# Altium PCB NeptuneSense_base_station.PcbDoc
Units mil, origin at the board's own origin, x right, y up, seen from the top; angles counter-clockwise.
Board outline 2980 x 3565 mil, 2 copper layers (Top Layer, Bottom Layer); 37 components, 30 nets, 216 pads, 27 vias.
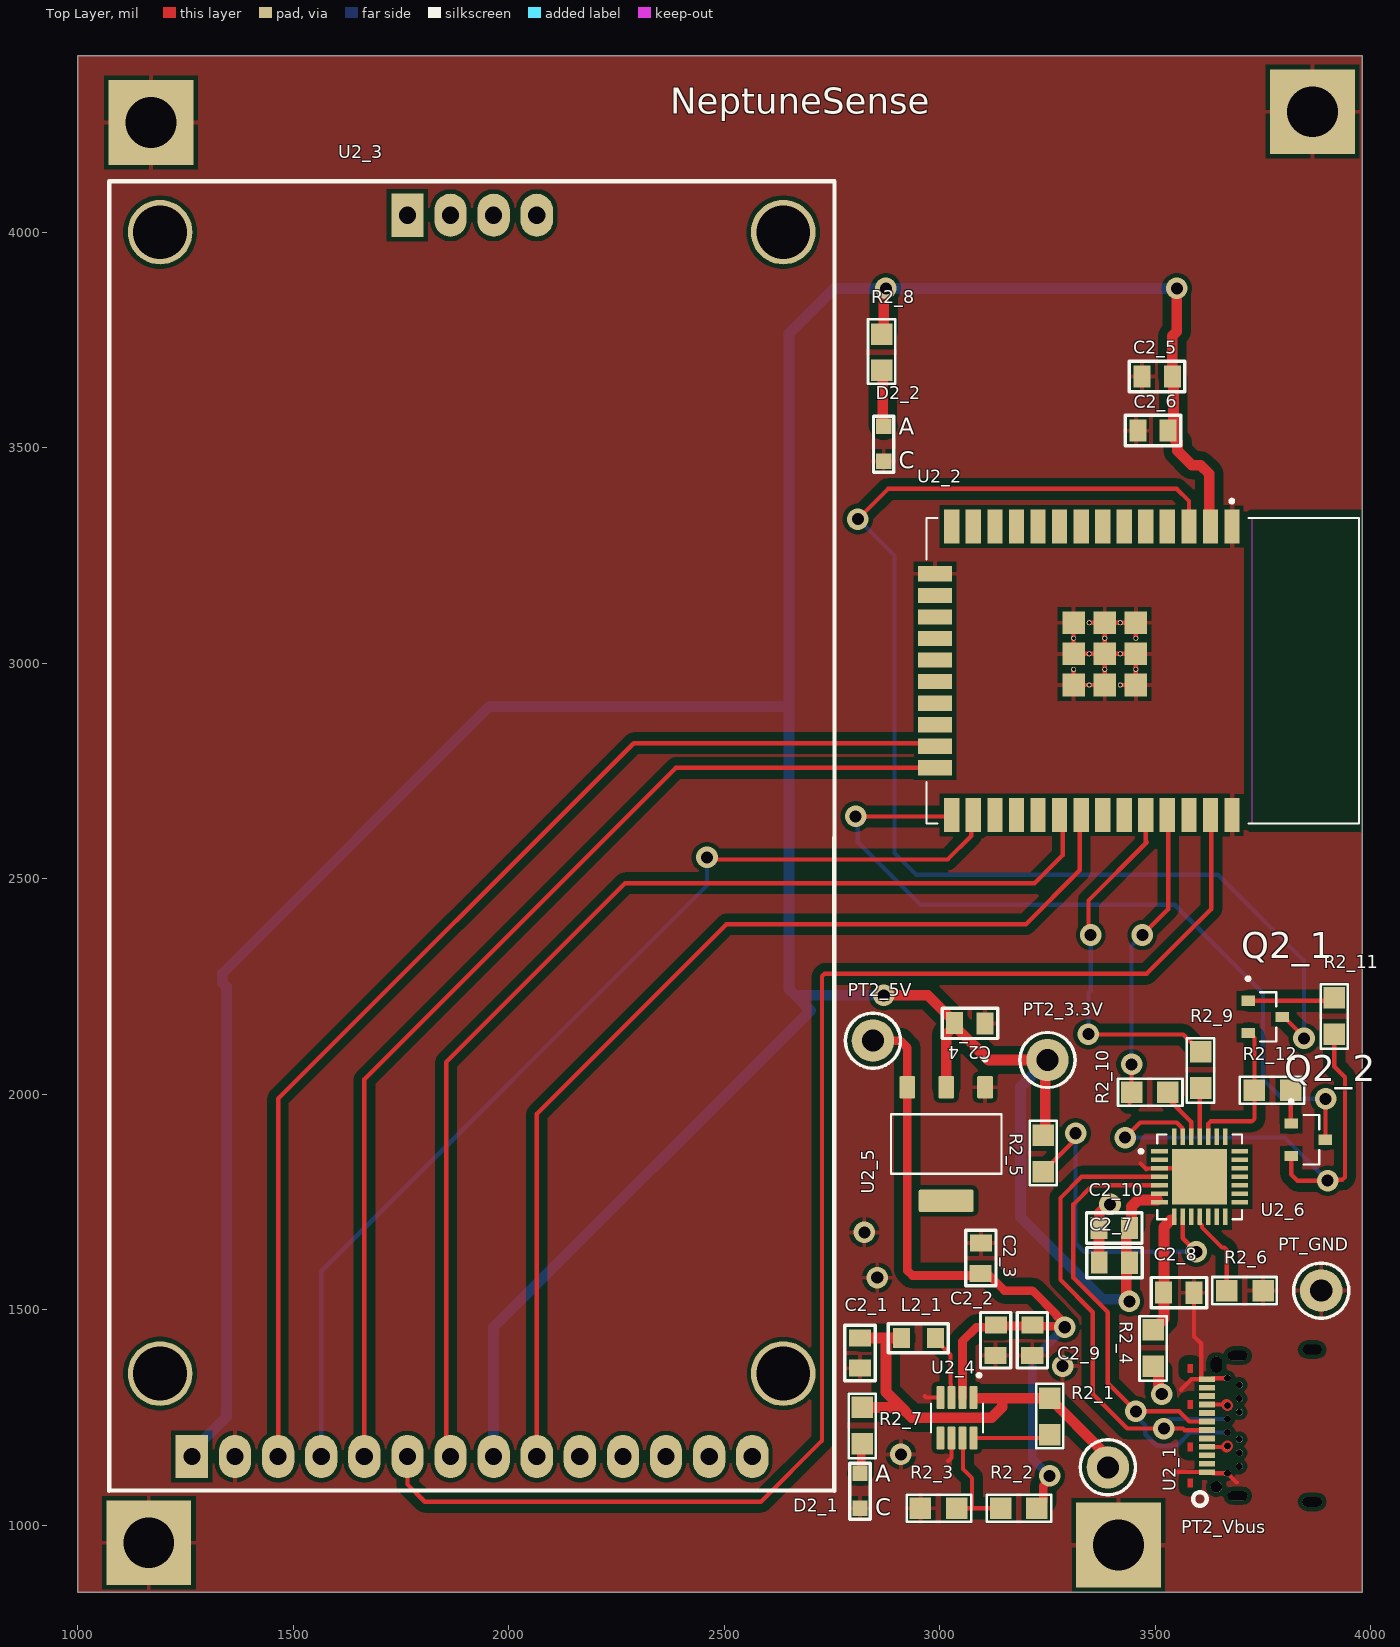
[diagram p0: Top Layer view]
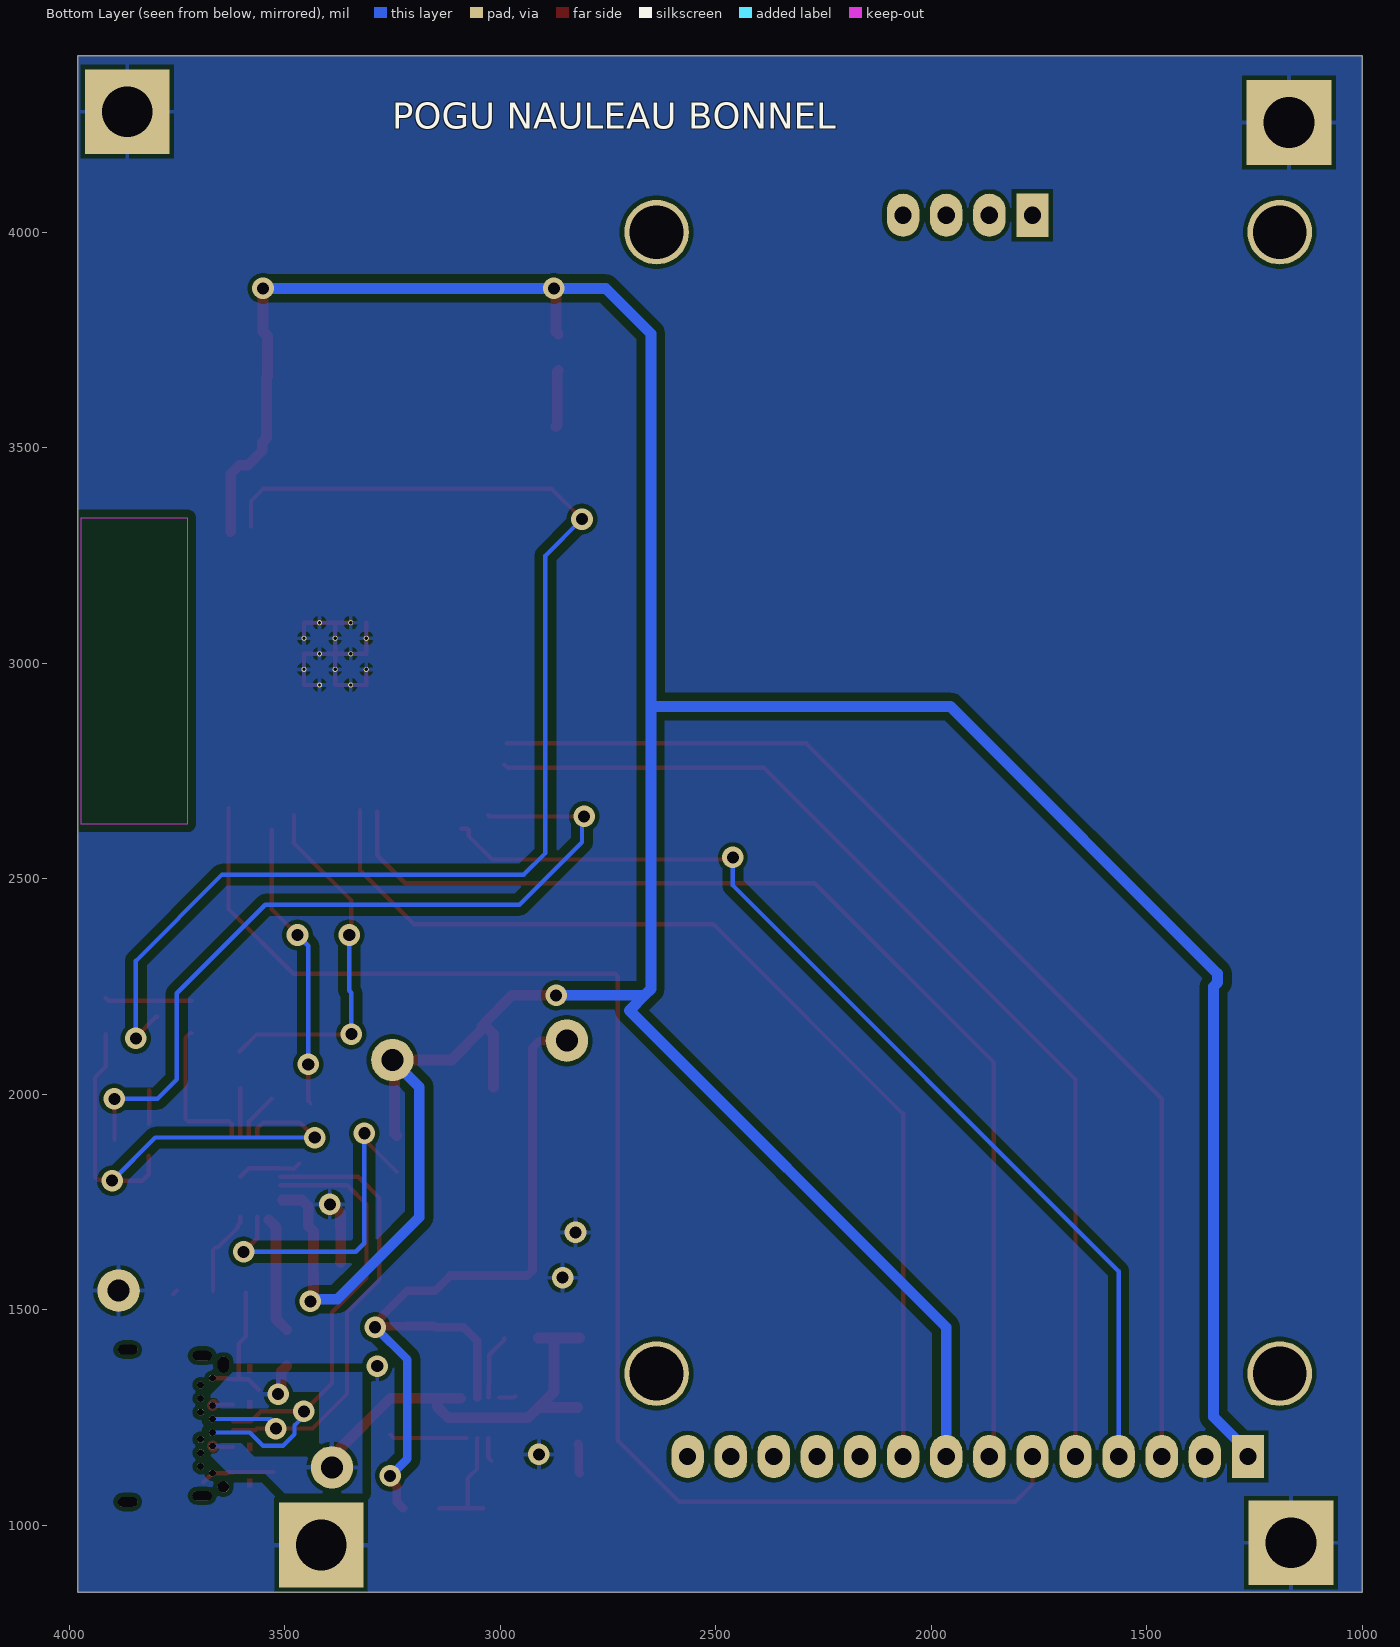
[diagram p1: Bottom Layer view, seen from below]
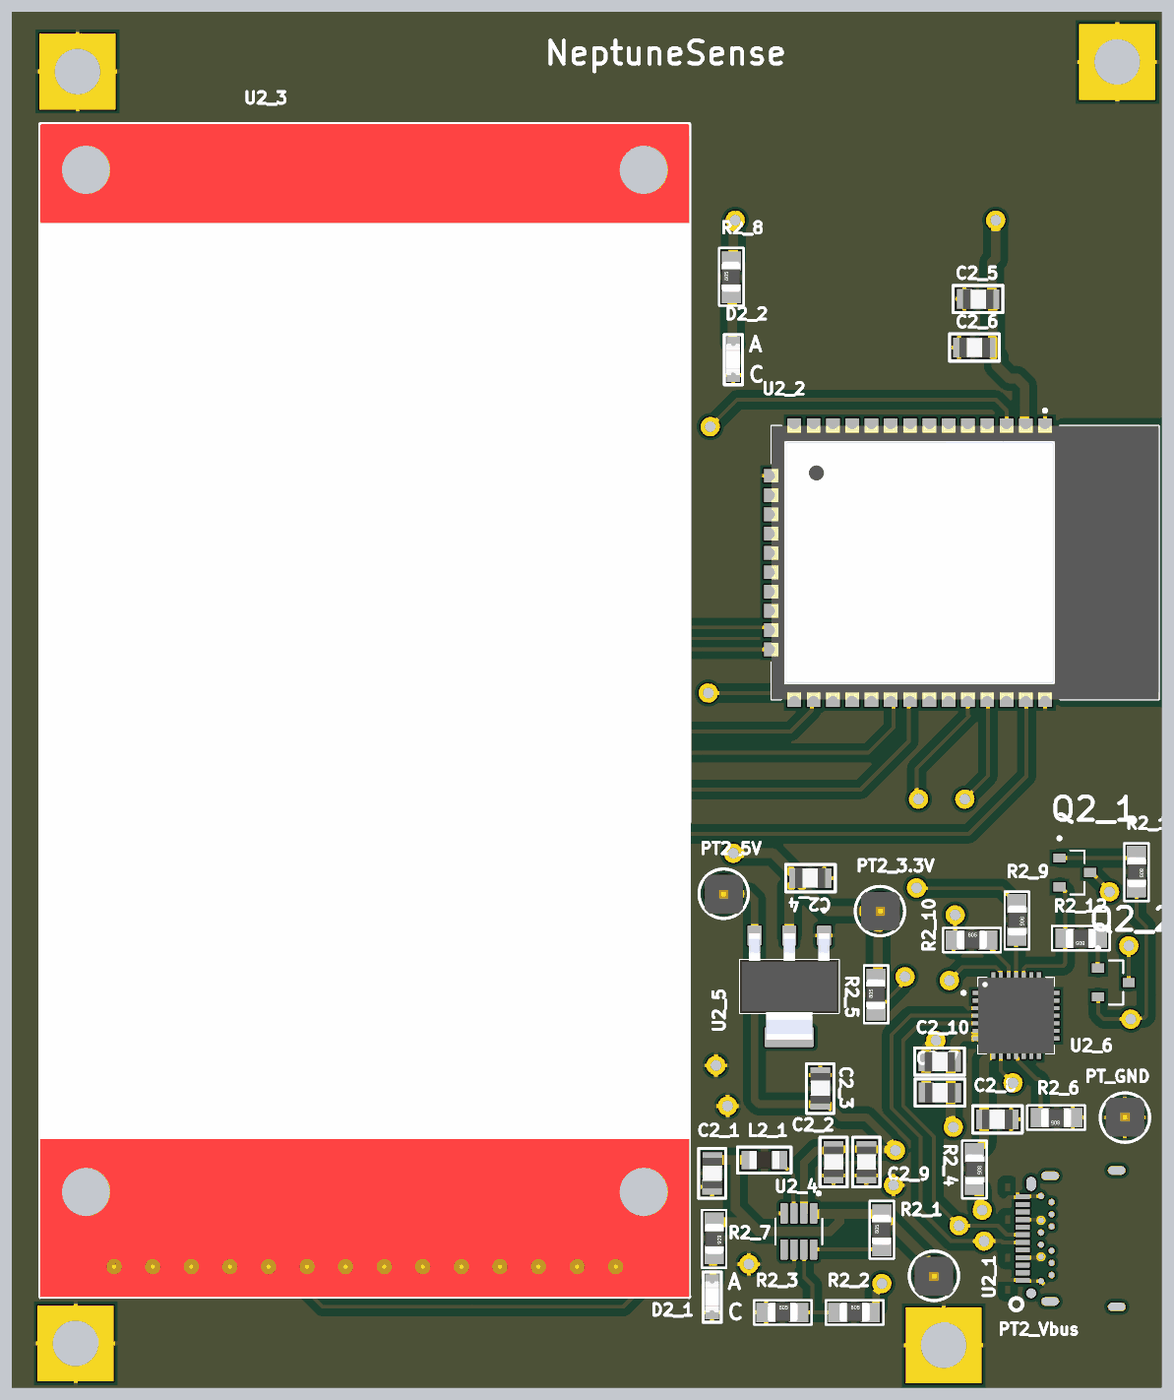
[diagram p2: 3D render of the assembled board from above, using the file's embedded part models]

## Layer stack, top to bottom
Top Solder: solder mask 0.4, Solder Resist, Dk 3.5
Top Layer: signal copper 1.4
Dielectric 1: dielectric 12.6, FR-4, Dk 4.8
Bottom Layer: signal copper 1.4
Bottom Solder: solder mask 0.4, Solder Resist, Dk 3.5

## Board outline
1000,845 1000,4410 3980,4410 3980,845

## Design rules (kind name [scope] priority, off if disabled: settings)
Clearance [All] p1: gap=10 ignorepadtopadclearanceinfootprint=FALSE except(0: Arc-Text Arc-Hole Track-Text Track-Hole SMDPad-Text SMDPad-Hole THPad-Text THPad-Hole Via-Text Via-Hole Fill-Text Fill-Hole Poly-Text Poly-Hole Region-Text Region-Hole Text-Text Text-Hole; 4: Arc-Arc Arc-Track Arc-SMDPad Arc-THPad Track-Track Track-SMDPad Track-THPad SMDPad-SMDPad SMDPad-THPad THPad-THPad; 19.68: Arc-Fill Arc-Poly Arc-Region Track-Fill Track-Poly Track-Region Fill-Fill Fill-Poly Fill-Region Poly-Poly Poly-Region Region-Region)
PolygonConnect [All] p1: connectstyle=Relief reliefconductorwidth=10 reliefentries=4 polygonreliefangle="90 Angle" airgapwidth=10
RoutingVias [All] p1: holewidth=28 width=50 viastyle="Through Hole" minholewidth=28 minwidth=50 maxholewidth=28 maxwidth=50
SolderMaskExpansion [All] p1: expansion=4 istentingtop=FALSE
Width [All] p1: maxlimit=200 minlimit=10 preferedwidth=25
30 further rules are at their usual default settings.

## Components (designator, comment, footprint, x,y, rotation, side; value= is the part's Value field where it differs from the comment)
C2_1 "CMS_0805" CONDENSATEUR_CMS_0805 2815,1365 r90 top value=10µF
C2_2 "CMS_0805" CONDENSATEUR_CMS_0805 3129.61,1394.53 r90 top value=22µF
C2_3 "CMS_0805" CONDENSATEUR_CMS_0805 3095,1585 r90 top value=10µF
C2_4 "CMS_0805" CONDENSATEUR_CMS_0805 3105,2165 r180 top value=22µF
C2_5 "CMS_0805" CONDENSATEUR_CMS_0805 3469.06,3665.79 r0 top value=10µF
C2_6 "CMS_0805" CONDENSATEUR_CMS_0805 3459.53,3540.39 r0 top value=100nF
C2_7 "CMS_0805" CONDENSATEUR_CMS_0805 3370,1610 r0 top value=100nF
C2_8 "CMS_0805" CONDENSATEUR_CMS_0805 3590,1540 r180 top value=10uF
C2_9 "CMS_0805" CONDENSATEUR_CMS_0805 3214.61,1394.53 r90 top value=1µF
C2_10 "CMS_0805" CONDENSATEUR_CMS_0805 3369.53,1690.39 r0 top value=10uF
D2_1 "LED_CMS_0805" LED_CMS_0805 2815,1121.2 r0 top
D2_2 "LED_CMS_0805" LED_CMS_0805 2870,3550 r0 top
L2_1 "INDUCTANCE_CMS_0805" INDUCTANCE_CMS_0805 2990,1435 r180 top value=1µH
PT2_3.3V "POINT_TEST" POINT_TEST 3250,2080 r0 top
PT2_5V "POINT_TEST" POINT_TEST 2845,2125 r270 top
PT2_Vbus "POINT_TEST" POINT_TEST 3390,1135 r270 top
PT_GND "POINT_TEST" POINT_TEST 3885,1545 r90 top
Q2_1 "SS8050-G" TRANS_SS8050-G 3755,2180 r0 top
Q2_2 "SS8050-G" TRANS_SS8050-G 3855,1895 r0 top
R2_1 "RESISTANCE_CMS_0805" RESISTANCE_CMS_0805 3255,1211 r90 top value=100k
R2_2 "RESISTANCE_CMS_0805" RESISTANCE_CMS_0805 3141,1040 r0 top value=1M
R2_3 "RESISTANCE_CMS_0805" RESISTANCE_CMS_0805 2955,1040 r0 top value=137k
R2_4 "RESISTANCE_CMS_0805" RESISTANCE_CMS_0805 3495,1454 r270 top value=0
R2_5 "RESISTANCE_CMS_0805" RESISTANCE_CMS_0805 3240,1821 r90 top value=2k
R2_6 "RESISTANCE_CMS_0805" RESISTANCE_CMS_0805 3750,1545 r180 top value=10k
R2_7 "RESISTANCE_CMS_0805" RESISTANCE_CMS_0805 2820,1274 r270 top value=3,3k
R2_8 "RESISTANCE_CMS_0805" RESISTANCE_CMS_0805 2865,3680 r90 top value=3,3k
R2_9 "RESISTANCE_CMS_0805" RESISTANCE_CMS_0805 3605,2099 r270 top value=0
R2_10 "RESISTANCE_CMS_0805" RESISTANCE_CMS_0805 3445,2005 r0 top value=0
R2_11 "RESISTANCE_CMS_0805" RESISTANCE_CMS_0805 3915,2224 r270 top value=10k
R2_12 "RESISTANCE_CMS_0805" RESISTANCE_CMS_0805 3814,2010 r180 top value=10k
U2_1 "*" USB 3963.5,1231.5 r90 top
U2_2 "ESP32-WROOM-32" MODULE_ESP32-WROOM-32 3470.94,2982.87 r270 top
U2_3 "ECRAN_TFT_2.4_TACTILE" ECRAN_TFT_2.4_TACTILE 2755,1080 r90 top
U2_4 "MP3414AGJ-Z" SOT65P280X100-8N 3040,1250 r270 top
U2_5 "AMS1117-3.3" SOT229P700X180-4N 3015,1885 r270 top
U2_6 "CP2102N-A02-GQFN28" QFN50P500X500X80-29N 3602.91,1809.06 r0 top

## Footprints (in the part's own frame and the unit in brackets; to place one, negate y for a bottom-side part, rotate by r counter-clockwise, add the part's x,y. Pads: shape width x height; smd on the part's side, far side on the other; paste and mask are expansions set on the pad)
CONDENSATEUR_CMS_0805 [mm] "CONDENSATEUR CMS 0805 ; DIMENSIONS : 2mm x 1.25mm"
  rect 1x1.3 smd: 1(0,0) 2(1.79,-0.01)
  silkscreen extent -0.74,-0.9 2.53,0.89, body extent -0.09,-0.67 1.91,0.64, height 0.73
ECRAN_TFT_2.4_TACTILE [mil]
  round 150 hole 125: 0(272.44,1563.78) 0(272.44,118.11) 0(2920.47,118.11) 0(2920.47,1563.78)
  rect 100x75 hole 40: 1(80,1490) 18(2959.84,990)
  oval 100x75 hole 40: 2(80,1390) 3(80,1290) 4(80,1190) 5(80,1090) 6(80,990) 7(80,890) 8(80,790) 9(80,690) 10(80,590) 11(80,490) 12(80,390) 13(80,290) 14(80,190) 15(2959.84,690) 16(2959.84,790) 17(2959.84,890)
  silkscreen extent 0,-1 3039,1682, body extent 0,-1 3039,1681, height 337
INDUCTANCE_CMS_0805 [mm] "INDUCTANCE CMS 0805 ; DIMENSIONS : 2mm x 1.25mm"
  rect 1x1.2 smd: 1(0,0) 2(2,0)
  silkscreen extent -0.75,-0.85 2.78,0.86, body extent 0,-0.6 2,0.6, height 0.95
LED_CMS_0805 [mm] "LED CMS 0805 ; DIMENSIONS : 2.0mm x 0.9mm"
  rect 0.9x0.9 smd: 1(0,0) 2(0,-2.063)
  silkscreen extent -0.6,-2.7 0.6,0.6, body extent -0.45,-2.06 0.45,0, height 0.85
MODULE_ESP32-WROOM-32 [mm]
  rect 2x0.9 smd: 1(-8.5,5.26) 2(-8.5,3.99) 3(-8.5,2.72) 4(-8.5,1.45) 5(-8.5,0.18) 6(-8.5,-1.09) 7(-8.5,-2.36) 8(-8.5,-3.63) 9(-8.5,-4.9) 10(-8.5,-6.17) 11(-8.5,-7.44) 12(-8.5,-8.71) 13(-8.5,-9.98) 14(-8.5,-11.25) 25(8.5,-11.25) 26(8.5,-9.98) 27(8.5,-8.71) 28(8.5,-7.44) 29(8.5,-6.17) 30(8.5,-4.9) 31(8.5,-3.63) 32(8.5,-2.36) 33(8.5,-1.09) 34(8.5,0.18) 35(8.5,1.45) 36(8.5,2.72) 37(8.5,3.99) 38(8.5,5.26)
  rect 0.9x2 smd: 15(-5.715,-12.25) 16(-4.445,-12.25) 17(-3.175,-12.25) 18(-1.905,-12.25) 19(-0.635,-12.25) 20(0.635,-12.25) 21(1.905,-12.25) 22(3.175,-12.25) 23(4.445,-12.25) 24(5.715,-12.25)
  rect 1.33x1.33 smd: 39_1(-2.835,-0.405) 39_2(-1,-0.405) 39_3(0.835,-0.405) 39_4(-2.835,-2.24) 39_5(-1,-2.24) 39_6(0.835,-2.24) 39_7(-2.835,-4.075) 39_8(-1,-4.075) 39_9(0.835,-4.075)
  round 0.3 hole 0.2: 39_10(-1.917,-0.405) 39_11(-0.082,-0.405) 39_12(-2.835,-1.322) 39_13(-1,-1.322) 39_14(0.835,-1.322) 39_15(-1.917,-2.24) 39_16(-0.082,-2.24) 39_17(-2.835,-3.157) 39_18(-1,-3.157) 39_19(0.835,-3.157) 39_20(-1.917,-4.075) 39_21(-0.082,-4.075)
  Keep-Out Layer region: 9,6.45 -9,6.45 -9,12.75 9,12.75
  Keep-Out Layer region: 9,6.45 -9,6.45 -9,12.75 9,12.75
  silkscreen extent -10.1,-12.75 9,12.75, body extent -9,-12.75 9,12.75, height 3.2
POINT_TEST [mm] "PASTILLE TRAVERSANTE ; DIAMETRE = 2.5 mm ; DIAMETRE PERCAGE = 1.3 mm"
  round 2.5 hole 1.3: 1(0,0)
  silkscreen extent -1.63,-1.62 1.63,1.62, body extent -1.24,-1.27 1.3,1.27, height 5.94
QFN50P500X500X80-29N [mm]
  rect 0.99x0.27 smd: 1(-2.36,1.5) 2(-2.36,1) 3(-2.36,0.5) 4(-2.36,0) 5(-2.36,-0.5) 6(-2.36,-1) 7(-2.36,-1.5) 15(2.36,-1.5) 16(2.36,-1) 17(2.36,-0.5) 18(2.36,0) 19(2.36,0.5) 20(2.36,1) 21(2.36,1.5)
  rect 0.27x0.99 smd: 8(-1.5,-2.36) 9(-1,-2.36) 10(-0.5,-2.36) 11(0,-2.36) 12(0.5,-2.36) 13(1,-2.36) 14(1.5,-2.36) 22(1.5,2.36) 23(1,2.36) 24(0.5,2.36) 25(0,2.36) 26(-0.5,2.36) 27(-1,2.36) 28(-1.5,2.36)
  rect 3.25x3.25 smd paste-0.597: 29(0,0)
  silkscreen extent -3.55,-2.5 2.5,2.5, body extent -2.5,-2.5 2.5,2.5, height 0.38
RESISTANCE_CMS_0805 [mil] "RESISTANCE CMS 0805 ; DIMENSIONS : 2mm x 1.25mm"
  rect 50x50 smd: 1(0,0) 2(84,0)
  silkscreen extent -31,-31 118,31, body extent 4,-24 83,26, height 31
SOT65P280X100-8N [mm]
  rrect25% 1.34x0.49 smd: 1(-1.19,0.975) 2(-1.19,0.325) 3(-1.19,-0.325) 4(-1.19,-0.975) 5(1.19,-0.975) 6(1.19,-0.325) 7(1.19,0.325) 8(1.19,0.975)
  silkscreen extent -2.6,-1.54 0.85,1.54
SOT229P700X180-4N [mm]
  rrect15% 1.31x0.93 smd: 1(-3.345,2.29) 2(-3.345,0) 3(-3.345,-2.29)
  rrect15% 1.31x3.24 smd: 4(3.345,0)
  silkscreen extent -5.1,-3.25 1.75,3.25, body extent -3.5,-3.25 3.5,3.25, height 1.8
TRANS_SS8050-G [mm]
  rect 0.8x0.6 smd: 1(-1.01,0.95) 2(-1.01,-0.95) 3(1.01,0)
  silkscreen extent -1.11,-1.45 0.65,2.35
USB [mm]
  oval 0.55x1.15 hole 0.55 slot 1.15 at 90 deg: "\""(4.49,2.53) S1(-4.13,6.92) S2(4.13,6.92) S4(-4.49,2.53)
  rect 0.33x0.93 smd: A1(-2.75,8.73) A2(-2.25,8.73) A3(-1.75,8.73) A4(-1.25,8.73) A5(-0.75,8.73) A6(-0.25,8.73) A7(0.25,8.73) A8(0.75,8.73) A9(1.25,8.73) A10(1.75,8.73) A11(2.25,8.73) A12(2.75,8.73)
  round 0.4 hole 0.4: B1(2.8,7.52) B2(2.4,6.82) B3(1.6,6.82) B4(1.2,7.52) B5(0.8,6.82) B6(0.4,7.52) B7(-0.4,7.52) B8(-0.8,6.82) B9(-1.2,7.52) B10(-1.6,6.82) B11(-2.4,6.82) B12(-2.8,7.52)
  round 0.675 hole 0.675 unplated: ""(-3.6,8.17)
  oval 0.955x0.653 hole 0.653 slot 0.955 at 0 deg unplated: ""(3.6,8.17)
  Top Layer region: 3.115,9.555 3.645,9.555 3.645,9.885 3.115,9.885
  Top Layer region: 0.985,9.555 1.515,9.555 1.515,9.885 0.985,9.885
  Top Layer region: -1.515,9.555 -0.985,9.555 -0.985,9.885 -1.515,9.885
  Top Layer region: -3.635,9.555 -3.105,9.555 -3.105,9.885 -3.635,9.885
  silkscreen extent -4.72,8.74 -3.92,9.54, body extent -4.84,-0.09 4.84,9.83, height 3.21

## Part data
C2_1 C2_2 C2_3 C2_4 C2_5 C2_6 C2_7 C2_8 C2_9 C2_10: library part CONDENSATEUR_CMS_CER_0805, "CONDENSATEUR CMS CERAMIQUE 0805", Type=CMS_0805
D2_1 D2_2: "LED CMS 0805", Type=CMS_0805
L2_1: "INDUCTANCE CMS 0805", Type=CMS_0805
PT2_3.3V PT2_5V PT2_Vbus PT_GND: library part CMP-118-000011-1, "POINT TEST", Design Item ID=POINT_TEST, Source=connecteurs.SchLib
Q2_1 Q2_2: library part CMP-202-000000-1, "Bipolar (BJT) Transistor NPN 25 V 1.5 A 100MHz 300 mW Surface Mount SOT-23-3", Package=None, Component Type=Standard, Design Item ID=SS8050-G, Digi-Key_Part_Number=641-1790-2-ND, MF=Comchip, MP=SS8050G, Pin Count=3, SnapEDA_Link=https://www.snapeda.com/parts/SS8050G/Comchip/view-part/?ref=snap, Source=SS8050-G.SchLib
R2_1 R2_2 R2_3 R2_4 R2_5 R2_6 R2_7 R2_8 R2_9 R2_10 R2_11 R2_12: "RESISTANCE CMS 0805", Type=CMS_0805
U2_1: library part USB
U2_2: library part CMP-184-000000-1, "Bluetooth, WiFi 802.11b/g/n, Bluetooth v4.2 +EDR, Class 1, 2 and 3 Transceiver Module 2.4GHz ~ 2.5GHz Antenna Not Included, U.FL Surface Mount", Package="Module Espressif Systems", Availability="In Stock", Component Type=Standard, Design Item ID=ESP32-WROOM-32, MF="Espressif Systems", MP=ESP32-WROOM-32, Pin Count=59, Price=None, Purchase-URL=https://pricing.snapeda.com/search/part/ESP32-WROOM-32/?ref=eda, SnapEDA_Link=https://www.snapeda.com/parts/ESP32-WROOM-32/Espressif+Systems/view-part/?ref=snap, Source=ESP32-WROOM-32.SchLib
U2_4: library part CMP-156-000001-1, "Boost Switching Regulator IC Positive Adjustable 2V 1 Output 3A SOT-23-8", Package="TSOT-23 MPS", Availability=Unavailable, Component Type=Standard, Design Item ID=MP3414AGJ-Z, MF="Monolithic Power", MP=MP3414AGJ-Z, Pin Count=8, Price=None, SnapEDA_Link=https://www.snapeda.com/parts/MP3414AGJ-Z/Monolithic%20Power%20Systems%20Inc./view-part/1062936/?ref=snap, Source=SnapEDAsch.SchLib
U2_5: library part CMP-154-000000-1, "LDO Voltage Regulators 800MA LDO LINEAR REG", Package="SOT-223 Seeed Technology", Availability="In Stock", Component Type=Standard, Design Item ID=AMS1117-3.3, MF="ams AG", MP=AMS1117-3.3, Pin Count=3, Price=None, Purchase-URL=https://pricing.snapeda.com/search/part/AMS1117-3.3/?ref=eda, SnapEDA_Link=https://www.snapeda.com/parts/AMS1117-3.3/AMS+AG/view-part/?ref=snap, Source=AMS1117-3.3.SchLib
U2_6: library part CMP-186-000000-1, "USB Bridge, USB to UART USB 2.0 UART Interface 28-QFN (5x5)", Package="WFQFN-28 Silicon Labs", Availability="In Stock", Component Type=Standard, Design Item ID=CP2102N-A02-GQFN28, MF="Silicon Labs", MP=CP2102N-A02-GQFN28, Pin Count=29, Price=None, Purchase-URL=https://pricing.snapeda.com/search/part/CP2102N-A02-GQFN28/?ref=eda, SnapEDA_Link=https://www.snapeda.com/parts/CP2102N-A02-GQFN28/Silicon+Labs/view-part/?ref=snap, Source=CP2102N-A02-GQFN28.SchLib

## Free pads (board coordinates)
  rect 196.85x196.85 hole 118.11: 11(1165,960) 11(1170,4255) 11(3415,955) 11(3865,4280)

## Via types
v1: diameter 50, hole 28, Top Layer to Bottom Layer, 27 vias

## Nets (pads, with @x,y where several pads share a name; then routed paths per layer and width w, separated by ;. In a path a pad name is that pad's centre, name@x,y a point inside that pad or via, vN(x,y) a via of type N, cw(c..) or ccw(c..) an arc to the next point about the centre after c; other vN are vias at no path point)
+3.3V: C2_4.2 C2_5.2 C2_6.2 C2_7.2 C2_10.2 PT2_3.3V.1 R2_5.2 R2_8.2 U2_2.2 U2_3.1 U2_3.8 U2_5.2 U2_6.6 U2_6.7 | length 9335.1
  Top Layer w25: R2_8.2 2870.22,3769.22 2870.22,3865.22 v1(2875,3870) ; v1(2870,2230) 2972.34,2230 3034.53,2167.81 C2_4.2 ; U2_5.2 3015,2139.96 3034.53,2159.49 C2_4.2 ; R2_5.2 3245,1910 3245,2075 PT2_3.3V.1 3112.9,2080 3041.71,2151.19 3041.71,2158.21 C2_4.2 ; v1(3440,1520) 3440,1526.76 3432.81,1533.95 3432.81,1581.87 3433.29,1582.34 3433.29,1636.87 3432.81,1637.34 3432.81,1682.81 3445,1695 3445,1740 3460,1755 U2_6.7@3505,1755 ; v1(3550,3870) 3550,3770.11 3539.53,3759.64 C2_5.2 3542.03,3662.89 3542.03,3522.89 3551.71,3513.21 3551.71,3493.29 3584.96,3460.04 3604.88,3460.04 3625,3439.92 U2_2.2@3625,3306.05
  Bottom Layer w25: U2_3.1 1265,1172.5 1345,1252.5 1345,2250 1335.36,2259.64 1335.36,2280.36 1955,2900 2650,2900 ; U2_3.8 1965,1460 2700,2195 2665,2230 ; v1(2870,2230) 2665,2230 ; PT2_3.3V.1 3187.5,2017.5 3187.5,1715.32 3378.04,1524.78 3435.22,1524.78 v1(3440,1520) ; v1(3550,3870) v1(2875,3870) 2755,3870 2650,3765 2650,2900 ; 2650,2900 2650,2245 2665,2230
+5V: C2_2.2 C2_3.1 C2_9.2 PT2_5V.1 R2_2.2 U2_4.2 U2_5.3 | length 1887.8
  Top Layer w20: PT2_5V.1 2908.28,2125 2924.84,2108.44 2924.84,1591.72 2936.56,1580 3115,1580 3150,1545 3215,1545 3270.25,1489.75 3270.25,1487.87 3290,1468.12 v1(3290,1460) 3287.5,1462.5 3215.47,1462.5 3215,1462.97 3152.89,1462.97 C2_2.2@3150.39,1460.47 ; U2_4.2 3052.8,1427.8 3085,1460 ; 3090.01,1460 C2_2.2@3150.39,1460 ; R2_2.2 3240,1055 3240,1091.88 3255,1106.88 v1(3255,1115)
  Bottom Layer w20: v1(3255,1115) 3215,1155 3215,1385 v1(3290,1460)
CS_TFT: U2_2.23 U2_3.3 | length 2691.7
  Top Layer w10: U2_3.3 1465,1990 2290,2815 U2_2.23@2985,2815
D+: U2_1.A6 U2_1.B6 U2_6.4 | length 1198.4
  Top Layer w10: U2_6.4 3329.06,1809.06 3280,1760 3280,1570 3355,1495 3355,1305 3435,1225 v1(3520,1225) 3564.14,1225 3567.81,1221.34 U2_1.A6@3619.8,1221.34
  Bottom Layer w10: v1(3520,1225) 3520,1235 3532.24,1247.24 U2_1.B6
D-: U2_1.A7 U2_1.B7 U2_6.5 | length 1209.5
  Top Layer w10: U2_6.5@3509.68,1789.37 3354.37,1789.37 3310,1745 3310,1575 3390,1495 3390,1330 v1(3455,1265) 3555,1265 3578.66,1241.34 U2_1.A7
  Bottom Layer w10: v1(3455,1265) 3455,1254.18 3476.8,1232.38 3476.8,1211.64 3503.43,1185 3550,1185 3580.75,1215.75 U2_1.B7
DC_TFT: U2_2.24 U2_3.5 | length 2502.4
  Top Layer w10: U2_3.5 1665,2035 2387.87,2757.87 2982.87,2757.87 U2_2.24@2990,2765
DTR: Q2_2.2 R2_11.2 U2_6.27 | length 1203.8
  Top Layer w10: v1(3430,1900) 3465,1935 3550,1935 3563.23,1921.77 3563.23,1902.28 U2_6.27 ; Q2_2.2 3815.24,1814.76 3830,1800 v1(3900,1800) 3902.43,1802.43 3934.14,1802.43 3940,1808.28 3940,2040 3915,2065 R2_11.2
  Bottom Layer w10: v1(3430,1900) 3800,1900 v1(3900,1800)
EN: Q2_1.3 U2_2.3 | length 2985
  Top Layer w10: v1(2810,3335) 2880,3405 3550,3405 3578.03,3376.97 U2_2.3 ; Q2_1.3 3798.7,2180 3845,2133.7 v1(3845,2130)
  Bottom Layer w10: v1(2810,3335) 2895,3250 2895,2560 2945,2510 3645,2510 3845,2310 v1(3845,2130)
FB2: R2_2.1 R2_3.2 U2_4.7 | length 274.3
  Top Layer w10: R2_3.2 3075,1040 ; U2_4.7 3053.74,1202.2 3053.74,1131.26 3075,1110 3075,1040 ; R2_2.1 3075,1040
GND: C2_1.1 C2_2.1 C2_3.2 C2_4.1 C2_5.1 C2_6.1 C2_7.1 C2_8.1 C2_9.1 C2_10.1 D2_1.2 D2_2.2 pad.11 PT_GND.1 R2_3.1 R2_6.1 U2_1.A1 U2_1.A12 U2_1.B1 U2_1.B12 U2_2.1 U2_2.15 U2_2.38 U2_2.39_1 U2_2.39_2 U2_2.39_3 U2_2.39_4 U2_2.39_5 U2_2.39_6 U2_2.39_7 U2_2.39_8 U2_2.39_9 U2_2.39_10 U2_2.39_11 U2_2.39_12 U2_2.39_13 U2_2.39_14 U2_2.39_15 U2_2.39_16 U2_2.39_17 U2_2.39_18 U2_2.39_19 U2_2.39_20 U2_2.39_21 U2_3.2 U2_4.4 U2_4.6 U2_5.1 U2_6.3 U2_6.29 | length 1647.5
  Top Layer w10: 2965,1300 2968.15,1296.85 U2_4.4 ; 3020,1150 3027.2,1157.2 U2_4.6 ; U2_2.39_21 U2_2.39_9 U2_2.39_19 U2_2.39_6 U2_2.39_16 U2_2.39_5 ; U2_2.39_7 U2_2.39_20 U2_2.39_8 U2_2.39_18 U2_2.39_5 ; U2_2.39_17 U2_2.39_4 ; C2_7.1 C2_7.1@3375,1615 ; U2_2.39_14 U2_2.39_3 U2_2.39_11 U2_2.39_2 U2_2.39_13 U2_2.39_5 ; U2_2.39_10 U2_2.39_1 U2_2.39_12 U2_2.39_4 ; 3465.81,1840 3479.31,1826.5 3481.23,1828.43 3509.68,1828.43 U2_6.3 3583.23,1828.74 U2_6.29 ; 3525,1124.25 3618.78,1124.25 U2_1.A1 3631.61,1123.23 3633.58,1121.26 U2_1.B12 3688.7,1100 ; 3560,1315 3584.13,1339.13 3619.17,1339.13 U2_1.A12 ; C2_8.1 3590,1438.58 3606.5,1422.09 3606.5,1341.26 3607.99,1339.76 U2_1.A12 ; U2_1.B1 3633.58,1341.73 3631.61,1339.76 U2_1.A12 ; R2_6.1 R2_6.1@3758.28,1536.72 ; U2_2.39_5 U2_2.39_15 U2_2.39_4
  Top Layer w25: C2_7.1 3369.76,1610.24 3369.76,1690.16 C2_10.1 3370,1690.87 3370,1725 3390,1745 v1(3395,1745)
  other v1: 2910,1165 3285,1370 2855,1575 2825,1680
IO0: Q2_2.3 U2_2.25 | length 1830.2
  Top Layer w10: v1(2805,2645) 3024.8,2645 U2_2.25 ; Q2_2.3 3894.76,1989.76 v1(3895,1990)
  Bottom Layer w10: v1(2805,2645) 2810,2640 2810,2585 2955,2440 3545,2440 3750,2235 3750,2035 3795,1990 v1(3895,1990)
MISO_TFT: U2_2.31 U2_3.9 | length 2428.5
  Top Layer w10: U2_3.9 2065,1955 2505,2395 3200,2395 3325,2520 U2_2.31@3325,2659.46
MOSI_TFT: U2_2.37 U2_3.6 | length 3381.8
  Top Layer w10: U2_3.6 1765,1095 1805,1055 2585,1055 2726.89,1196.89 2726.89,2274.14 2732.75,2280 3480,2280 3630,2430 U2_2.37@3630,2664.64
NetC2_8_2: C2_8.2 R2_4.1 U2_6.8 | length 272.4
  Top Layer w25: R2_4.1 3520,1479 3520,1692.48 3536.67,1709.15
NetD2_1_1: D2_1.1 R2_7.2 | length 70.9
  Top Layer w20: D2_1.1 2817.5,1123.7 2817.5,1187.5 R2_7.2
NetD2_2_1: D2_2.1 R2_8.1 | length 132.1
  Top Layer w25: R2_8.1 2867.5,3677.5 2867.5,3552.5 D2_2.1
NetL2_1_1: L2_1.1 U2_4.3 | length 153.6
  Top Layer w10: L2_1.1 2990,1431.06 3025,1396.06 3025,1329.29 3026.26,1328.03 3026.26,1297.8 U2_4.3
NetQ2_1_1: Q2_1.1 R2_11.1 | length 202.5
  Top Layer w10: Q2_1.1 3908.4,2217.4 R2_11.1
NetQ2_2_1: Q2_2.1 R2_12.1 | length 78.1
  Top Layer w10: R2_12.1 3814,1933.64 Q2_2.1
NetR2_1_1: R2_1.1 U2_4.8 | length 179.9
  Top Layer w10: U2_4.8 3247.15,1203.15 R2_1.1
NetR2_5_1: R2_5.1 U2_6.9 | length 757.5
  Top Layer w10: R2_5.1 3307.35,1888.35 3307.35,1902.35 v1(3315,1910) ; U2_6.9 3563.54,1666.46 v1(3595,1635)
  Bottom Layer w10: v1(3315,1910) 3315,1655 3335,1635 v1(3595,1635)
NetR2_6_2: R2_6.2 U2_6.11 | length 200.2
  Top Layer w10: U2_6.11 3602.91,1701.97 3608.28,1696.6 3608.28,1691.72 3655,1645 3660,1645 3666,1639 R2_6.2
NetR2_9_2: R2_9.2 U2_6.25 | length 113
  Top Layer w10: U2_6.25 R2_9.2@3602.91,2015
NetR2_10_2: R2_10.2 U2_6.26 | length 110.1
  Top Layer w10: R2_10.2@3530,1990 3583.23,1936.77 U2_6.26
RESET_TFT: U2_2.26 U2_3.4 | length 2447.9
  Top Layer w10: U2_3.4@1560,1175 1565,1170 U2_3.4 ; v1(2460,2550) 2465,2545 3018.23,2545 3072.95,2599.72 3072.95,2613.86 3075.86,2616.77 U2_2.26@3090,2616.77
  Bottom Layer w10: U2_3.4 1565,1590 2460,2485 v1(2460,2550)
RTS: Q2_1.2 R2_12.2 U2_6.24 | length 349.6
  Top Layer w10: U2_6.24 3622.6,1931.74 3628.46,1937.6 3724.14,1937.6 3730,1943.46 R2_12.2 3730,2131.77 3719.17,2142.6 Q2_1.2
Rx: R2_9.1 U2_2.34 | length 846.3
  Top Layer w10: v1(3345,2140) 3346,2139 3565,2139 R2_9.1 ; v1(3350,2370) 3345,2375 3345,2450 3480.3,2585.3 3478.03,2587.56 U2_2.34
  Bottom Layer w10: v1(3345,2140) 3345,2235.83 3350,2240.83 v1(3350,2370)
SCK_TFT: U2_2.30 U2_3.7 | length 2648.9
  Top Layer w10: U2_3.7 1855,1170 1855,2075 2270,2490 3220,2490 3285,2555 U2_2.30@3285,2655.92
Tx: R2_10.1 U2_2.35 | length 671.1
  Top Layer w10: R2_10.1@3440,1980 3445,1985 v1(3445,2070) ; v1(3470,2370) 3530,2430 U2_2.35@3530,2613.86
  Bottom Layer w10: v1(3445,2070) 3445,2345 v1(3470,2370)
Vbus: C2_1.2 L2_1.2 PT2_Vbus.1 R2_1.2 R2_4.2 R2_7.1 U2_1.A4 U2_1.A9 U2_1.B4 U2_1.B9 U2_4.1 | length 1206.3
  Top Layer w10: U2_1.A4 U2_1.B9@3665.47,1182.28 ; U2_1.A9 U2_1.B4@3665.47,1280.71
  Top Layer w25: C2_1.2 2815.63,1435.24 2875,1435.24 ; R2_7.1 2909,1274 2910,1275 ; L2_1.2 2911.02,1435.24 2875,1435.24 ; 3091.85,1295 3145,1295 ; PT2_Vbus.1@3375.95,1109.05 3375.95,1174.05 R2_1.2 3145,1295 ; R2_4.2 3507.5,1357.5 3507.5,1312.5 v1(3515,1305) ; U2_1.B9@3665.47,1182.28 U2_1.B9 ; U2_1.B4@3665.47,1280.71 U2_1.B4 ; 2875,1435.24 2875,1310 2910,1275 ; 2910,1275 2935,1250 3120,1250 3145,1275 3145,1295
pads on no net: "U2_1.\"" U2_1. U2_1.A2 U2_1.A3 U2_1.A5 U2_1.A8 U2_1.A10 U2_1.A11 U2_1.B2 U2_1.B3 U2_1.B5 U2_1.B8 U2_1.B10 U2_1.B11 U2_1.S1 U2_1.S2 U2_1.S4 U2_2.4 U2_2.5 U2_2.6 U2_2.7 U2_2.8 U2_2.9 U2_2.10 U2_2.11 U2_2.12 U2_2.13 U2_2.14 U2_2.16 U2_2.17 U2_2.18 U2_2.19 U2_2.20 U2_2.21 U2_2.22 U2_2.27 U2_2.28 U2_2.29 U2_2.32 U2_2.33 U2_2.36 U2_3.0 U2_3.10 U2_3.11 U2_3.12 U2_3.13 U2_3.14 U2_3.15 U2_3.16 U2_3.17 U2_3.18 U2_4.5 U2_5.4 U2_6.1 U2_6.2 U2_6.10 U2_6.12 U2_6.13 U2_6.14 U2_6.15 U2_6.16 U2_6.17 U2_6.18 U2_6.19 U2_6.20 U2_6.21 U2_6.22 U2_6.23 U2_6.28

## Polygon pours and split planes (outlines as drawn)
GND on Bottom Layer "GND_L02_P003" (solid, pour order 3): 1000,845 1000,4410 3980,4410 3980,845
Vbus on Bottom Layer "VBUS_L02_P000" (solid, pour order 0): 3675,1265 3515,1265 3480,1300 3480,1310 3420,1310 3420,1175 3435,1160 3570,1160 3610,1200 3615,1195 3675,1195 3675,1165 3630,1120 3545,1120 3500,1075 3320,1075 3320,1355 3620,1355 3675,1300
GND on Top Layer "GND" (solid, pour order 4): 1000,845 1000,4410 3980,4410 3980,845
GND on Top Layer "GND_L01_P005" (solid, pour order 5): 3240,3145 3550,3145 3550,2890 3555,2885 3545,2875 3245,2875 3245,3150

## Silkscreen, mask and mechanical layers (free items; w line width, h text height)
Top Overlay:
  text "NeptuneSense" at 2375,4274.99 h60
Bottom Overlay:
  text "POGU NAULEAU BONNEL" at 3250,4240 h60
Mechanical 1:
  the board outline again, w10

## Text inside footprints (layer, text, board x,y; h text height)
D2_1: Top Overlay "A" at 2850.43,1101.52 h39.37; Top Overlay "C" at 2850.43,1022.78 h39.37
D2_2: Top Overlay "C" at 2905.43,3451.57 h39.37; Top Overlay "A" at 2905.43,3530.32 h39.37
U2_2: Mechanical 13 "ANTENNA" at 3825.28,3219.09 h70 r270